# Altium PCB PCB_CL-TPI-01.PcbDoc
Units mil, origin at the board's own origin, x right, y up, seen from the top; angles counter-clockwise.
Board outline 3893 x 2557 mil, 2 copper layers (Top Layer, Bottom Layer); 76 components, 39 nets, 186 pads, 150 vias.
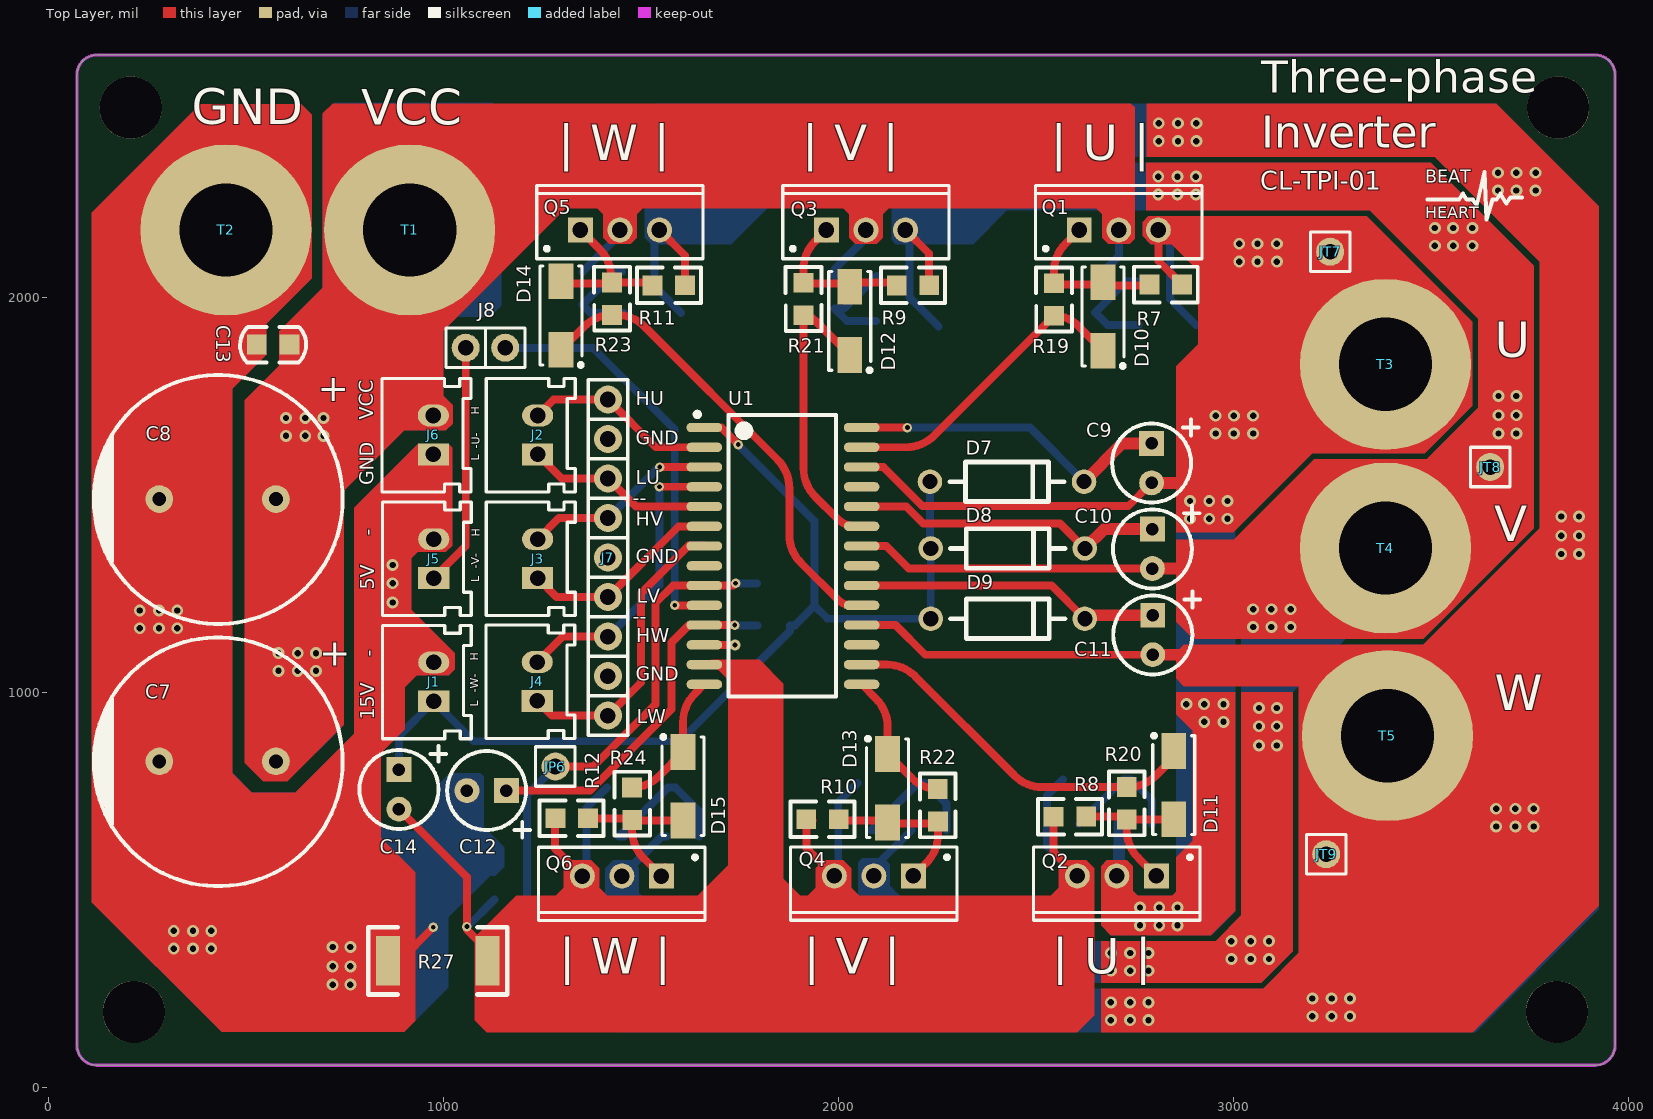
[diagram p0: Top Layer view]
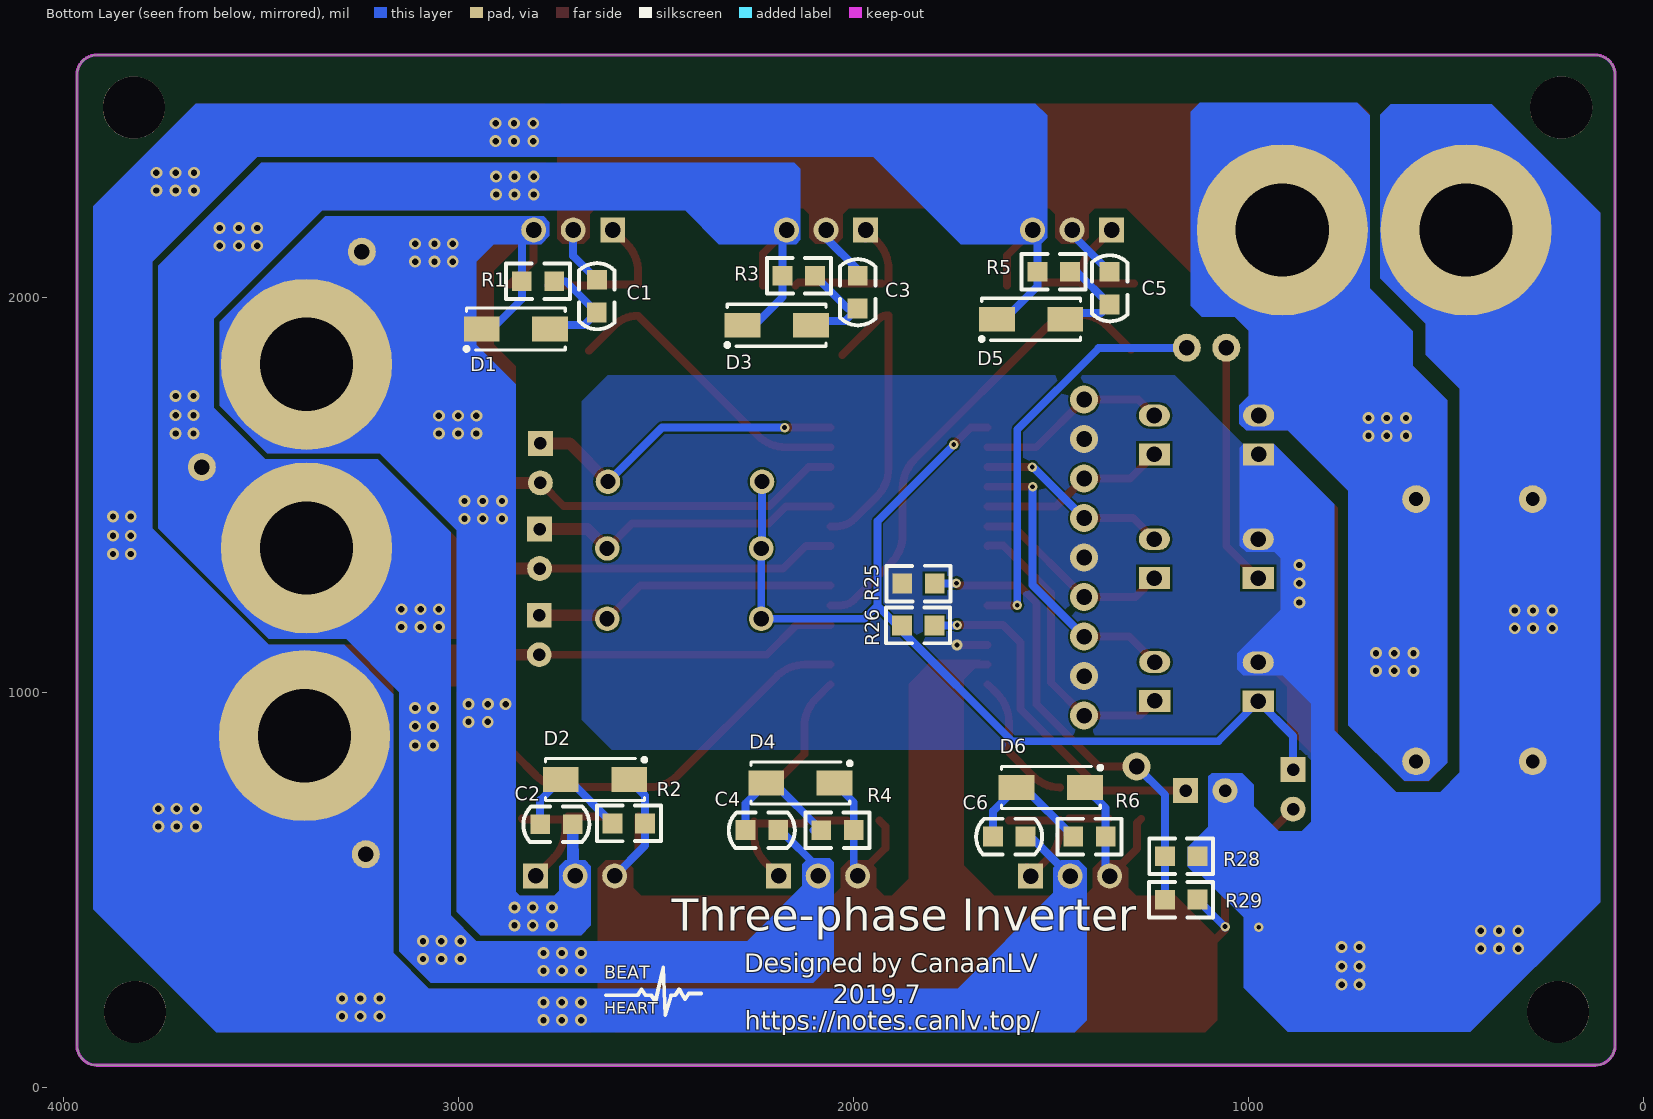
[diagram p1: Bottom Layer view, seen from below]
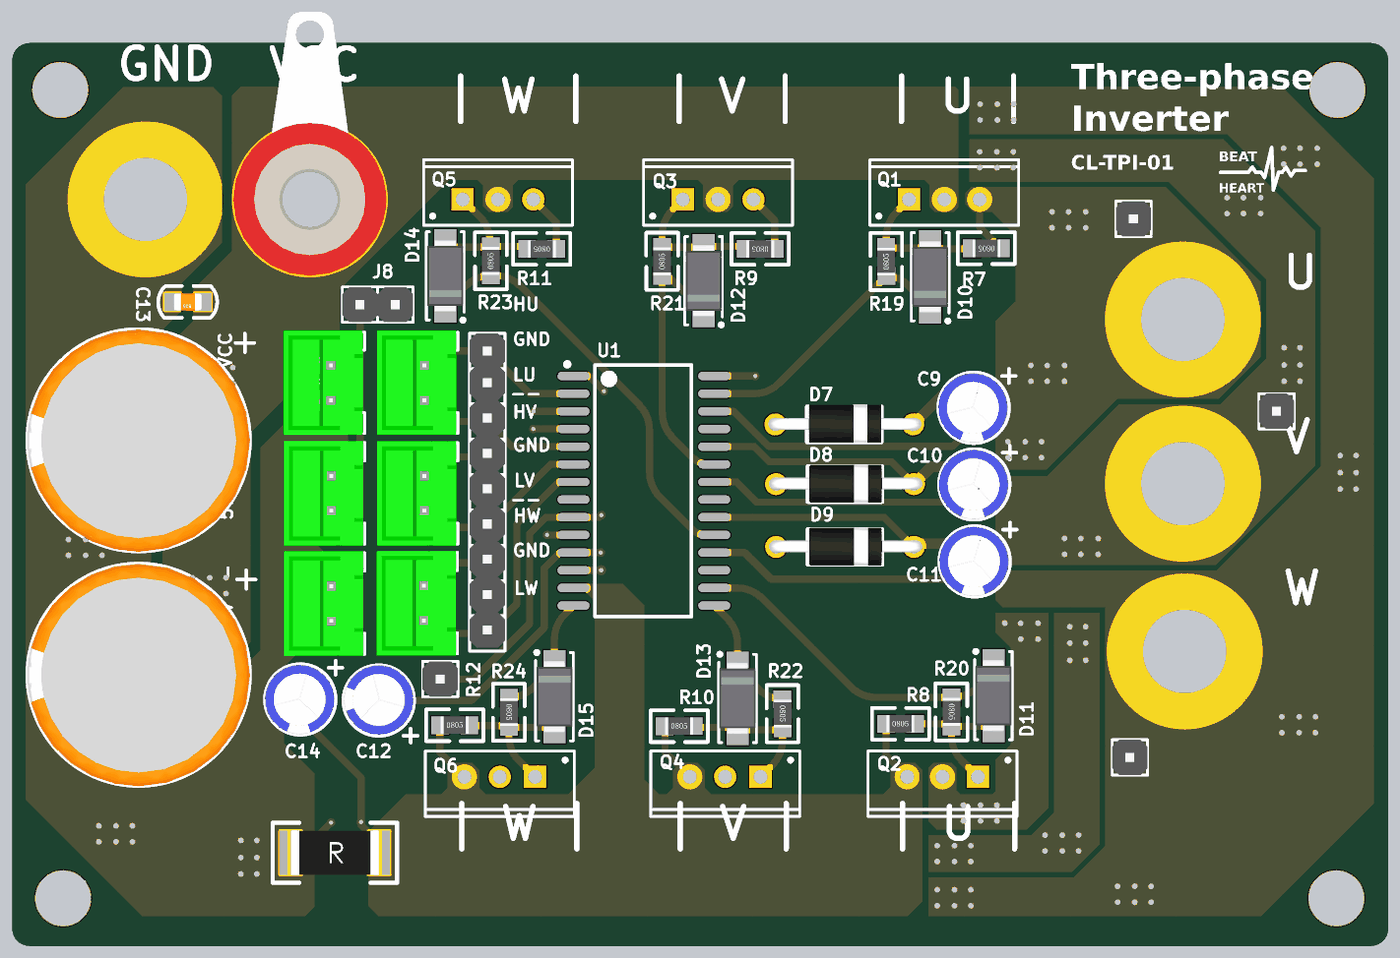
[diagram p2: 3D render of the assembled board from above, using the file's embedded part models]
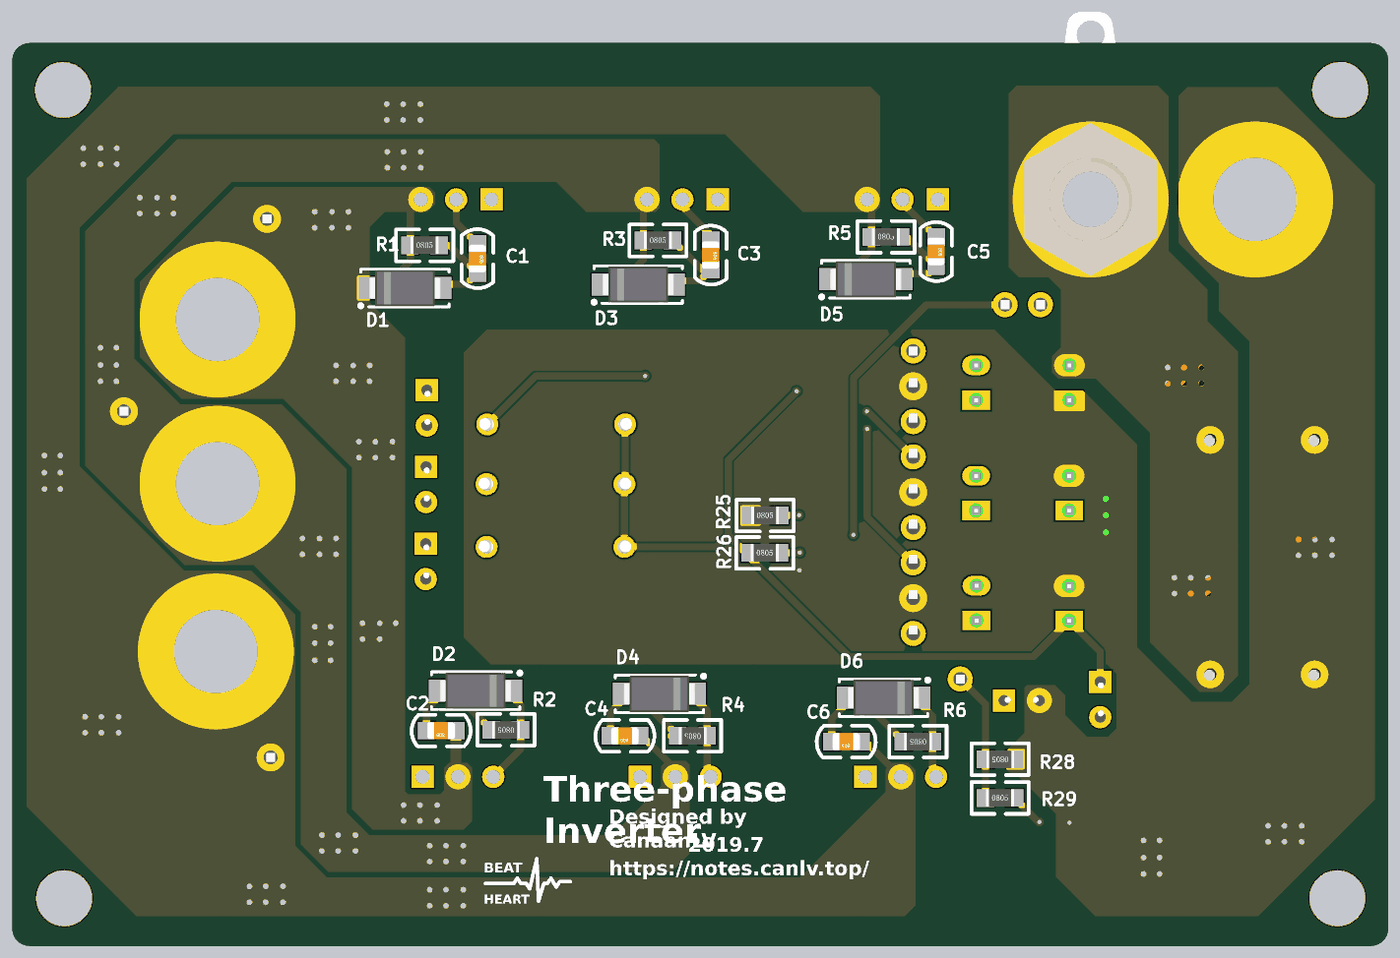
[diagram p3: 3D render of the assembled board from below, using the file's embedded part models]

## Layer stack, top to bottom
Top Solder: solder mask 0.4, Solder Resist, Dk 3.5
Top Layer: signal copper 1.4
Dielectric 1: dielectric 12.6, FR-4, Dk 4.8
Bottom Layer: signal copper 1.4
Bottom Solder: solder mask 0.4, Solder Resist, Dk 3.5

## Board outline
73,106 ccw(c123,106) 123,56 3916,56 ccw(c3916,106) 3966,106 3966,2563 ccw(c3916,2563) 3916,2613 123,2613 ccw(c123,2563) 73,2563

## Design rules (kind name [scope] priority, off if disabled: settings)
BoardOutlineClearance [All] p1: gap=7.87
Clearance [All] p1: gap=5 except(0: Arc-Text Track-Text Fill-Text Poly-Text Region-Text Text-Text; 3.5: SMDPad-Text THPad-Text Via-Text; 5.98: Arc-Via Track-Via THPad-Fill THPad-Poly THPad-Region Via-Fill Via-Poly Via-Region; 6: Arc-SMDPad Arc-THPad Track-SMDPad Track-THPad; 10: SMDPad-SMDPad SMDPad-THPad SMDPad-Via THPad-THPad THPad-Via Via-Via)
DiffPairsRouting [All] p1: maxlimit=10 minlimit=6 mostfreqgap=10 toplayer_minwidth=5.98 toplayer_maxwidth=15 toplayer_prefwidth=15 bottomlayer_minwidth=5.98 bottomlayer_maxwidth=15 bottomlayer_prefwidth=15 maxuncoupledlength=500
Height [All] p1: minheight=0 maxheight=39370.08 prefheight=500
HoleSize [All] p1: absolutevalues=TRUE maxlimit=23.62 minlimit=11.81 maxpercent=80.000 minpercent=20.000
MinimumSolderMaskSliver [All] p1: minsoldermaskwidth=1.97
PlaneConnect [All] p1: planeconnectstyle=Direct reliefexpansion=20 reliefentries=4 reliefconductorwidth=10 reliefairgap=10
PolygonConnect [All] p1: connectstyle=Direct reliefconductorwidth=10 reliefentries=4 polygonreliefangle="90 Angle" airgapwidth=10
RoomDefinition Sheet_CL-TPI-01 [InComponentClass('Sheet1')] p1: confinementstyle=ConfineIn formatcopy=TRUE lockcomponents=FALSE outline 52,35 3990,35 3990,2725 52,2725
RoutingVias [All] p1: holewidth=15.75 width=27.56 viastyle="Through Hole" minholewidth=11.81 minwidth=23.62 maxholewidth=248.03 maxwidth=275.59
SilkToSilkClearance [All] p1: silktosilkclearance=5
SilkToSolderMaskClearance [IsPad] p1: minsilkscreentomaskgap=3.5 clearancetoexposedcopper=FALSE
SolderMaskExpansion [All] p1: expansion=4
Width [All] p1: maxlimit=80 minlimit=5 preferedwidth=10
23 further rules are at their usual default settings.

## Components (designator, comment, footprint, x,y, rotation, side; value= is the part's Value field where it differs from the comment)
C1 "RCD" C0805 2650,2050 r270 bottom
C2 "RCD" C0805 2705,666 r0 bottom
C3 "RCD" C0805 1990,2060 r270 bottom
C4 "RCD" C0805 2185,651 r0 bottom
C5 "RCD" C0805 1352.3,2070 r270 bottom
C6 "RCD" C0805 1559,634.8 r0 bottom
C7 "470UF" CZ16X25 429,825 r0 top
C8 "470UF" CZ16X25 429,1489 r0 top
C9 "10uF" CZ0.50/25V47U 2793,1630 r180 top
C10 "10uF" CZ0.50/25V47U 2795,1413 r180 top
C11 "10uF" CZ0.50/25V47U 2796,1195 r180 top
C12 "47uF" CZ0.50/25V47U 1160,751 r90 top
C13 "0.1uF" C0805 617,1880 r180 top
C14 "47uF" CZ0.50/25V47U 888,804 r180 top
D1 "RCD" SMA-1 2855,1919 r0 bottom
D2 "RCD" SMA-1 2655,779 r180 bottom
D3 "RCD" SMA-1 2195,1929 r0 bottom
D4 "RCD" SMA-1 2135,770 r180 bottom
D5 "RCD" SMA-1 1551,1944 r0 bottom
D6 "RCD" SMA-1 1501,759 r180 bottom
D7 "FR207" DO-41-2 2427,1533 r0 top
D8 "FR207" DO-41-2 2429,1364 r0 top
D9 "FR207" DO-41-2 2429,1186 r0 top
D10 "M7" SMA-1 2670,1951 r270 top
D11 "M7" SMA-1 2849,765 r90 top
D12 "M7" SMA-1 2029,1940 r270 top
D13 "M7" SMA-1 2125,757 r90 top
D14 "M7" SMA-1 1298,1953.47 r270 top
D15 "M7" SMA-1 1607,762 r90 top
J1 "15V" 2.54XH接插件2P 976,977 r90 top
J2 "PWM1-U" 2.54XH接插件2P 1239,1602 r90 top
J3 "PWM2-V" 2.54XH接插件2P 1239,1289 r90 top
J4 "PWM3-W" 2.54XH接插件2P 1238,978 r90 top
J5 "5V" 2.54XH接插件2P 976,1289 r90 top
J6 "SIP-2" 2.54XH接插件2P 975,1602 r90 top
J7 "SIP-9" 2.54排针1X9 1417,1341 r270 top locked
J8 "MP" 2.54排针1X2 1057,1872 r0 top
JP6 "SIP-1" 2.54排针1X1 1284,812 r0 top
JT7 "SIP-1" 2.54排针1X1 3245,2115 r0 top
JT8 "SIP-1" 2.54排针1X1 3650,1570 r0 top
JT9 "SIP-1" 2.54排针1X1 3235,590 r0 top
Q1 "IRF540N" TO-220AB 2710,2170 r0 top
Q2 "IRF540N" TO-220AB 2705,535 r180 top
Q3 "IRF540N" TO-220AB 2070,2170 r0 top
Q4 "IRF540N" TO-220AB 2090,535 r180 top
Q5 "IRF540N" TO-220AB 1447.3,2170 r0 top
Q6 "IRF540N" TO-220AB 1452.3,534.8 r180 top
R1 "RCD" R0805 2840,2040 r180 bottom
R2 "RCD" R0805 2528,668 r0 bottom
R3 "RCD" R0805 2180,2054 r180 bottom
R4 "RCD" R0805 2000,651 r0 bottom
R5 "RCD" R0805 1535,2064 r180 bottom
R6 "RCD" R0805 1362.3,634.8 r0 bottom
R7 "10k" R0805 2870,2032 r180 top
R8 "10k" R0805 2545,685 r0 top
R9 "10k" R0805 2230,2030 r180 top
R10 "10k" R0805 1919,678.39 r0 top
R11 "10k" R0805 1612.3,2030 r180 top
R12 "10k" R0805 1284,681 r0 top
R19 "20" R0805 2546,1953 r90 top
R20 "20" R0805 2730,760 r270 top
R21 "20" R0805 1912,1954 r90 top
R22 "20" R0805 2252,755 r270 top
R23 "20" R0805 1427.3,1955 r90 top
R24 "20" R0805 1478,759 r270 top
R25 "" R0805 1877,1275 r180 bottom
R26 "" R0805 1878,1169 r180 bottom
R27 "0.025m" R2512 860,320 r180 top
R28 "R贴片电阻" R0805 1130,585 r0 bottom
R29 "R贴片电阻" R0805 1212.3,475 r180 bottom
T1 "香蕉头接线柱" 香蕉接线柱Red_6mm 915,2170 r0 top
T2 "香蕉头接线柱" 香蕉接线柱Black_6mm 450,2170 r0 top
T3 "香蕉头接线柱" 香蕉接线柱Black_6mm 3385,1830 r270 top
T4 "香蕉头接线柱" 香蕉接线柱Black_6mm 3385,1365 r270 top
T5 "香蕉头接线柱" 香蕉接线柱Black_6mm 3390,890 r270 top
U1 "IC28" SOIC-28_300MIL 1860,1345 r0 top

## Footprints (in the part's own frame and the unit in brackets; to place one, negate y for a bottom-side part, rotate by r counter-clockwise, add the part's x,y. Pads: shape width x height; smd on the part's side, far side on the other; paste and mask are expansions set on the pad)
2.54XH接插件2P [mm]
  rect 1.4x2 hole 1: 1(0,0)
  oval 1.4x2 hole 1: 2(2.5,0)
  silkscreen extent -2.41,-2.41 4.88,3.3, body extent -2.51,-2.3 4.99,3.4, height 7
2.54排针1X1 [mm]
  round 1.8 hole 1: 1(0,0)
  silkscreen extent -1.27,-1.27 1.27,1.27, body extent -1.27,-1.27 1.27,1.27, height 2.5
2.54排针1X2 [mm]
  round 1.8 hole 1: 1(0,0) 2(2.54,0)
  silkscreen extent -1.27,-1.27 3.81,1.27, body extent -1.27,-1.27 3.81,1.27, height 8.54
2.54排针1X9 [mm]
  round 1.8 hole 1: 1(-10.16,0) 2(-7.62,0) 3(-5.08,0) 4(-2.54,0) 5(0,0) 6(2.54,0) 7(5.08,0) 8(7.62,0) 9(10.16,0)
  silkscreen extent -11.43,-1.27 11.43,1.27, body extent -11.43,-1.27 11.18,1.27, height 2.5
C0805 [mil]
  rect 50x50 smd: 1(6,0) 2(88.7,-0.1)
  silkscreen extent -36,-45 131,45, body extent 8,-25 87,25, height 30
CZ0.50/25V47U [mm]
  rect 1.6x1.6 hole 0.8: 1(0,0)
  round 1.6 hole 0.8: 2(0,2.54)
  silkscreen extent -3.02,-1.52 2.54,3.81, body extent -2.45,-1.23 2.54,3.77, height 7.3
CZ16X25 [mil]
  round 70 hole 35: 1(147.64,0) 2(-147.64,0)
  silkscreen extent -313,-316 317,314, body extent -313,-317 317,313, height 984
DO-41-2 [mil]
  round 62 hole 38: A(-195,0) K(195,0)
  silkscreen extent -145,-50 145,50, body extent -215,-52 219,55, height 107
R0805 [mil] "1/8W"
  rect 50x50 smd: 1(0,0) 2(82.3,0.2)
  silkscreen extent -40,-45 122,45, body extent 1,-24 80,25, height 22
R2512 [mil]
  rect 60x125 smd: 1(0,0) 2(-251.97,0)
  silkscreen extent -302,-85 50,85, body extent -260,-65 8,65, height 25
SMA-1 [mm]
  rect 2.3x1.6 smd: A(-2.2,0) K(2.2,0)
  silkscreen extent -3.17,-1.35 3.3,1.39, body extent -2.6,-1.3 2.6,1.3, height 2.4
SOIC-28_300MIL [mm]
  oval 2.3x0.6 smd: 1(-5.058,8.255) 2(-5.058,6.985) 3(-5.058,5.715) 4(-5.058,4.445) 5(-5.058,3.175) 6(-5.058,1.905) 7(-5.058,0.635) 8(-5.058,-0.635) 9(-5.058,-1.905) 10(-5.058,-3.175) 11(-5.058,-4.445) 12(-5.058,-5.715) 13(-5.058,-6.985) 14(-5.058,-8.255) 15(5.058,-8.255) 16(5.058,-6.985) 17(5.058,-5.715) 18(5.058,-4.445) 19(5.058,-3.175) 20(5.058,-1.905) 21(5.058,-0.635) 22(5.058,0.635) 23(5.058,1.905) 24(5.058,3.175) 25(5.058,4.445) 26(5.058,5.715) 27(5.058,6.985) 28(5.058,8.255)
  silkscreen extent -5.66,-9.05 3.42,9.25
TO-220AB [mm] "TO, Thru-Hole, Vertical, Heatsink Mounted; 3 In-Line Leads; Pitch 2.54 mm"
  rect 1.6x1.6 hole 1: 1(-2.54,0)
  round 1.6 hole 1: 2(0,0) 3(2.54,0)
  silkscreen extent -5.35,-1.85 5.35,2.85, body extent -5.4,-1.9 5.4,2.9, height 19.3
香蕉接线柱Black_6mm [mm]
  round 11 hole 6: 1(0,0)
  body extent -5.5,-5.5 5.5,13.5, height 9
香蕉接线柱Red_6mm [mm]
  round 11 hole 6: 1(0,0)
  body extent -5.5,-5.5 5.5,13.5, height 9

## Part data
C1 C2 C3 C4 C5 C6 C13: library part C贴片电容
C7 C8 C9 C10 C11 C12 C14: library part C直插电容
D1 D2 D3 D4 D5 D6 D10 D11 D12 D13 D14 D15: library part 0805D
D7 D8 D9: library part DO-41
J1 J2 J3 J4 J5 J8: library part SIP-2
Q1 Q2 Q3 Q4 Q5 Q6: "HEXFET Power MOSFET"
R1 R2 R3 R4 R5 R6 R7 R8 R9 R10 R11 R12 R19 R20 R21 R22 R23 R24 R25 R26 R27: library part R贴片电阻

## Free pads (board coordinates)
  round 157.48 hole 157.48: 0(209,2480) 1(217,191) 2(3819,191) 3(3822,2480)

## Via types
v1: diameter 30, hole 16, Top Layer to Bottom Layer, tented both sides, 140 vias
v2: diameter 24, hole 12, Top Layer to Bottom Layer, tented both sides, 9 vias
v3: diameter 28, hole 13, Top Layer to Bottom Layer, tented both sides, 1 vias

## Nets (pads, with @x,y where several pads share a name; then routed paths per layer and width w, separated by ;. In a path a pad name is that pad's centre, name@x,y a point inside that pad or via, vN(x,y) a via of type N, cw(c..) or ccw(c..) an arc to the next point about the centre after c; other vN are vias at no path point)
COM: C14.2 D2.K D4.K D6.K Q2.3 Q4.3 Q6.3 R2.1 R4.1 R6.1 R8.1 R10.1 R12.1 R27.2 R29.2 U1.13 | length 2600.3
  Top Layer w20: C14.2 1060,532 v2(1060,407) 1060,399 1111.97,347.03 R27.2 ; R12.1@1272.3,679.8 1283,669.1 1283,604.1 Q6.3 ; U1.13 1734,1070 1775,1029 1775,472 1772,469 ; R10.1@1935,675 1920,660 1920,605 Q4.3 ; R8.1 2545,595 Q2.3
  Bottom Layer w20: v2(1060,407) 1060,405 1059.9,405.1 R29.2 ; Q6.3 1362.3,544.8 R6.1 1362.3,706.91 D6.K ; Q4.3 2000,545 R4.1 2000,721.61 D4.K ; D2.K 2528,738.61 R2.1 2528,612 Q2.3
EN: J8.2 U1.10 | length 1039.2
  Top Layer w20: v2(1586,1220) U1.10
  Bottom Layer w20: J8.2@1157,1883 1169,1871 1380,1871 1586,1665 v2(1586,1220)
FAULT: U1.8
GND: C7.2 C8.2 C12.2 C13.2 J1.2 J5.2 J6.1 J7.2 J7.5 J7.8 R25.1 R27.1 R28.1 T2.1 U1.12 | length 447.5
  Top Layer w20: R27.1 890,320 v2(975,405) ; U1.12 v3(1739,1120)
  Bottom Layer w20: v2(975,405) R28.1@1130,560
  other v1: 720,260 765,260 720,306.25 765,306.25 318,351 366.75,351 413,351 720,355 765,355 318,396 366.75,396 413,396 232,1162 280.75,1162 327,1162 232,1207 280.75,1207 327,1207 872,1227 872,1275.75 872,1322
HIN1: J2.2 J7.1 U1.2 | length 488.8
  Top Layer w20: J2.2 1279.57,1741 J7.1 1538,1620 U1.2
HIN2: J3.2 J7.4 U1.3 | length 497.5
  Top Layer w20: J3.2 1292.57,1441 J7.4 ; v2(1548,1570) U1.3
  Bottom Layer w20: J7.4 1546,1570 v2(1548,1570)
HIN3: J4.2 J7.7 U1.4 | length 752.3
  Top Layer w20: J4.2 1302.57,1141 J7.7 ; v2(1547.3,1520) U1.4
  Bottom Layer w20: J7.7 1547.3,1271.3 v2(1547.3,1520)
HO1: D10.K R19.1 U1.27 | length 777.5
  Top Layer w20: U1.27 2171.58,1620 ccw(c2171.58,1720) 2242.29,1649.29 R19.1 cw(c2546,1867.57) 2606.41,1927.98 D10.K
HO2: D12.K R21.1 U1.23 | length 769.5
  Top Layer w20: D12.K 1939.97,1942.41 ccw(c1912,1914.44) R21.1 1912,1566.42 ccw(c2012,1566.42) 1941.29,1495.71 1998,1439 ccw(c2043.87,1484.87) 2043.87,1420 U1.23
HO3: D14.K R23.1 U1.19 | length 1201.2
  Top Layer w20: D14.K 1357.05,1925.9 cw(c1427.3,1855.64) R23.1 1438.58,1955 cw(c1438.58,1855) 1509.29,1925.71 1846.71,1588.29 cw(c1776,1517.58) 1876,1517.58 1876,1398.42 ccw(c1976,1398.42) 1905.29,1327.71 1999,1234 ccw(c2032.8,1267.8) 2032.8,1220 U1.19
ITRIP: JP6.1 R25.2 R28.2 R29.1 U1.9 | length 1219.9
  Top Layer w20: JP6.1 1380,812 1537,969 1537,1225 1582,1270 U1.9 1734,1270 v2(1740,1276)
  Bottom Layer w20: R29.1 R28.2 1212.3,740.3 JP6.1 ; v2(1740,1276) 1740.8,1275.2 R25.2
LIN1: J2.1 J7.3 U1.5 | length 476.6
  Top Layer w20: J2.1 1300,1541 J7.3 1488,1470 U1.5
LIN2: J3.1 J7.6 U1.6 | length 515.9
  Top Layer w20: J3.1 1287,1241 J7.6 1596,1420 U1.6
LIN3: J4.1 J7.9 U1.7 | length 749.1
  Top Layer w20: J4.1 1275,941 J7.9 1501,1025 1501,1251 1621,1371 1659.89,1371 U1.7
LO1: D11.K R20.1 U1.16 | length 948.5
  Top Layer w20: U1.16 2123.58,1070 cw(c2123.58,970) 2194.29,1040.71 2445.71,789.29 ccw(c2516.42,860) 2516.42,760 R20.1 2733.58,760 ccw(c2733.58,860) 2804.29,789.29 D11.K@2857.81,842.81
LO2: D13.K R22.1 U1.15 | length 359.1
  Top Layer w20: U1.15 2095.71,983.4 cw(c2025,912.69) 2125,912.69 D13.K 2186.47,782.14 ccw(c2252,847.67) R22.1
LO3: D15.K R24.1 U1.14 | length 351.4
  Top Layer w20: R24.1 ccw(c1478,854.09) 1545.24,786.85 D15.K 1607,924.69 cw(c1707,924.69) 1636.29,995.4 U1.14
NetC1_2: C1.2 D1.A R1.2 | length 263.1
  Bottom Layer w20: R1.2 2729,2040.2 C1.2 2681.4,1930 D1.A@2760,1930
NetC2_2: C2.2 D2.A R2.2 | length 311.8
  Bottom Layer w20: R2.2 2721.5,779 D2.A 2793.7,726.91 C2.2
NetC3_2: C3.2 D3.A R3.2 | length 259.8
  Bottom Layer w20: D3.A@2095,1940 2021.4,1940 C3.2 2014.8,1971.3 R3.2
NetC4_2: C4.2 D4.A R4.2 | length 348.9
  Bottom Layer w20: R4.2@2102,650.8 R4.2 2201.5,770 D4.A 2273.7,717.91 C4.2
NetC5_2: C5.2 D5.A R5.2 | length 248.4
  Bottom Layer w20: R5.2 1435.3,2064.2 C5.2 1373.7,1960 D5.A@1457.3,1960
NetC6_2: C6.2 D6.A R6.2 | length 357.2
  Bottom Layer w20: R6.2@1458.3,634.6 R6.2 1569,759 D6.A 1647.7,698.91 C6.2
NetD10_A: D10.A Q1.1 R7.2 R19.2 | length 384.6
  Top Layer w20: R19.2@2545.8,2032.3 2664.45,2032.3 cw(c2664.45,2024.45) 2670,2030 2771.73,2030 cw(c2771.73,2028.63) R7.2@2772.7,2029.6 ; R19.2 2545.8,2064.38 cw(c2645.8,2064.38) 2575.09,2135.09 Q1.1
NetD11_A: D11.A Q2.1 R8.2 R20.2 | length 386.1
  Top Layer w20: R8.2 2722.7,685.2 R20.2 ; Q2.1 2759.49,580.51 cw(c2830.2,651.22) 2730.2,651.22 R20.2 ; D11.A@2840,680 2837.7,677.7 R20.2
NetD12_A: D12.A Q3.1 R9.2 R21.2 | length 396.7
  Top Layer w20: R21.2 1911.8,2070.38 cw(c2011.8,2070.38) 1941.09,2141.09 Q3.1 Q3.1@1970,2148.52 ; R21.2@1930,2035 2037.5,2035 2039.8,2037.3 2140.2,2037.3 R9.2
NetD13_A: D13.A Q4.1 R10.2 R22.2 | length 397.2
  Top Layer w20: R10.2@2017.3,675.2 2119.8,675.2 2127.3,667.7 R22.2@2252.2,667.7 ; Q4.1 2222.91,567.91 ccw(c2152.2,638.62) 2252.2,638.62 R22.2@2252.2,667.7 ; R22.2 R22.2@2252.2,667.7
NetD14_A: D14.A Q5.1 R11.2 R23.2 | length 405.9
  Top Layer w20: D14.A@1291,2035 R23.2@1424.8,2035 ; Q5.1 1395.51,2121.79 cw(c1324.8,2051.08) 1424.8,2051.08 R23.2@1424.8,2035 ; R11.2 1522.5,2037.3 R23.2 R23.2@1424.8,2035
NetD15_A: D15.A Q6.1 R12.2 R24.2 | length 423.3
  Top Layer w20: R12.2@1354.6,680 R24.2@1455,680 ; Q6.1@1561.8,557.73 cw(c1529.37,557.73) Q6.1 1507.49,579.61 cw(c1578.2,650.32) 1478.2,650.32 R24.2 ccw(c1481.37,679.87) 1481.37,675.39 D15.A
RCIN: C12.1 R26.2 U1.11 | length 908.6
  Top Layer w20: C12.1 1372,751 1578,957 1578,1126 1622,1170 U1.11 v2(1738,1170)
  Bottom Layer w20: v2(1738,1170) 1738.8,1169.2 R26.2
VB1: C9.1 D7.K U1.28 | length 830.8
  Top Layer w20: U1.28 v2(2175,1670)
  Top Layer w30: D7.K 2719,1630 C9.1
  Bottom Layer w20: v2(2175,1670) 2485,1670 D7.K
VB2: C10.1 D8.K U1.24 | length 800.1
  Top Layer w20: U1.24 2172,1470 2215,1427 2561,1427 D8.K
  Top Layer w30: D8.K 2673,1413 C10.1
VB3: C11.1 D9.K U1.20 | length 775.4
  Top Layer w20: U1.20 2540,1270 D9.K
  Top Layer w30: D9.K 2633,1195 C11.1
VCC: C1.1 C3.1 C5.1 C7.1 C8.1 C13.1 J6.2 Q1.2 Q3.2 Q5.2 T1.1 | length 445.3
  Bottom Layer w20: C5.1 1447.3,2159 Q5.2 ; C3.1 1990,2070 2070,2150 Q3.2 ; C1.1 2710,2104 Q1.2
  other v1: 583,1054 631.75,1054 678,1054 583,1099 631.75,1099 678,1099 602,1649 650.75,1649 697,1649 602,1694 650.75,1694 697,1694
VCC5V: J5.1 J8.1 | length 616.6
  Top Layer w20: J5.1 1057,1370 J8.1
VCC15V: C14.1 D7.A D8.A D9.A J1.1 R26.1 U1.1 | length 2612.9
  Top Layer w20: U1.1 1704,1670 v2(1747,1627)
  Bottom Layer w20: C14.1 888,889 J1.1 1077,876 1599,876 1878,1155 R26.1 1890,1169 1940,1219 ; v2(1747,1627) 1747,1626 1940,1433 1940,1219 ; D7.A 2232,1366 D8.A D9.A 1973,1186 1940,1219
VS1: C2.1 C9.2 D1.K JT7.1 Q1.3 Q2.2 R1.1 R7.1 T3.1 U1.26 | length 1924.2
  Top Layer w20: U1.26 2114,1570 2213,1471 2734,1471 C9.2 ; Q1.3 2810,2092 R7.1
  Top Layer w30: C9.2 2883,1530 2886,1527 ; 3110,1555 T3.1
  Bottom Layer w20: Q2.2 2705,601 ; Q1.3 2840,2140 R1.1 2840,1995 D1.K@2905,1930
  Bottom Layer w30: Q2.2 2711,541 C2.1
  other v1: 2763.75,410 2812.5,410 2858.75,410 2763.75,455 2812.5,455 2858.75,455 2926.25,925 2975,925 2881,970 2926,970 2975,970 2890,1439 2938.75,1439 2985,1439 2890,1484 2938.75,1484 2985,1484 2955,1655 3001.25,1655 3050,1655 2955,1700 3001.25,1700 3050,1700 3015,2090 3061.25,2090 3110,2090 3015,2135 3061.25,2135 3110,2135
VS2: C4.1 C10.2 D3.K JT8.1 Q3.3 Q4.2 R3.1 R9.1 T4.1 U1.22 | length 1524.6
  Top Layer w20: U1.22 2121.3,1370 2178.3,1313 C10.2 ; Q3.3 2230,2110 R9.1
  Top Layer w30: C10.2 2889,1313 2890,1314 ; T4.1@3335,1315 T4.1
  Bottom Layer w20: Q4.2 2090,556 C4.1@2185,651 ; Q3.3 2180,2160 R3.1 2180,2000 D3.K@2254,1926
  other v1: 2690,295 2738.75,295 2785,295 2995,325 3043.75,325 3090,325 2690,340 2738.75,340 2785,340 2995,370 3043.75,370 3090,370 3065,865 3110,865 3065,913.75 3110,913.75 3065,960 3110,960 3050,1165 3096.25,1165 3145,1165 3050,1210 3096.25,1210 3145,1210 3671.25,1655 3716.25,1655 3671.25,1701.25 3716.25,1701.25 3671.25,1750 3716.25,1750 3510,2130 3556.25,2130 3605,2130 3510,2175 3556.25,2175 3605,2175 2810,2260 2858.75,2260 2905,2260 2810,2305 2858.75,2305 2905,2305
VS3: C6.1 C11.2 D5.K JT9.1 Q5.3 Q6.2 R5.1 R11.1 T5.1 U1.18 | length 1462.7
  Top Layer w20: Q5.3 1612.3,2105 R11.1 ; U1.18 2145,1170 2220,1095 C11.2 ; 3275.67,1075 3305,1104.33
  Top Layer w30: C11.2 2881,1095 2884,1098
  Bottom Layer w20: Q6.2 1552.3,634.8 C6.1 ; Q5.3 1535,2157.7 R5.1 1535,2027.3 D5.K@1602.3,1960
  other v1: 2690,170 2738.75,170 2785,170 3200,180 3248.75,180 3295,180 2690,215 2738.75,215 2785,215 3200,225 3248.75,225 3295,225 3665,660 3713.75,660 3760,660 3665,705 3713.75,705 3760,705 3830,1350 3875,1350 3830,1396.25 3875,1396.25 3830,1445 3875,1445 3670,2270 3716.25,2270 3765,2270 3670,2315 3716.25,2315 3765,2315 2811.25,2395 2860,2395 2906.25,2395 2811.25,2440 2860,2440 2906.25,2440
pads on no net: U1.17 U1.21 U1.25

## Polygon pours and split planes (outlines as drawn)
GND on Bottom Layer "GND_L02_P004" (solid, remove dead copper, pour order 4): 1014,1628 1188,1802 1746,1802 2622,1802 2688,1736 2688,930 2612,854 868,854 831,817 810,838 810,1424

## Keep-outs
Keep-Out Layer:
  lines w7.87: 73,106 ccw(c123,106) 123,56 3916,56 ccw(c3916,106) 3966,106 3966,2563 ccw(c3916,2563) 3916,2613 123,2613 ccw(c123,2563) 73,2563 73,2479 73,106

## Other copper
Top Layer:
  region net COM: 1694,1059 1721,1032 1721,562 1639,480 1643,476 1913,476 1861,528 1861,1022 1801,1082 1679,1082
  region net VCC: 694,2023 585,1914 585,1826 498,1739 498,822 545,775 605,775 748,918 748,1663 1035,1950
  region net VCC: 736,1497 902,1663 1007,1663 1024,1680 1024,1727 1000,1751 1000,1919 955,1919 736,1700
  region net GND: 663,2466 641,2488 385,2488 111,2214 111,469 439,141 902,141 929,168 929,544 727,746 515,746 466,795 466,1768 552,1854 552,1933 667,2048 667,2462
  region net GND: 937,1629 775,1467 775,894.83 573.58,693.41 649,618 831,618 842,629 842,846 902.5,906.5 902.5,1012.5 933,1043 1014,1043 1029,1058 1029,1099 919,1209 919,1339 935,1355 1007,1355 1023,1371 1023,1619 1014,1628
  region net VCC: 1035,1950 1140,2055 1310,2225 2750,2225 2750,2480.2 2740.2,2490 720,2490 695,2465 695,1950
  region net VCC: 1405,2150 1420,2135 1475,2135 1490,2150 1490,2210 1505,2225 1390,2225 1405,2210
  region net VCC: 2027.7,2150 2042.7,2135 2097.7,2135 2112.7,2150 2112.7,2210 2127.7,2225 2012.7,2225 2027.7,2210
  region net VCC: 2667.7,2150 2682.7,2135 2737.7,2135 2750,2147.3 2750,2225 2652.7,2225 2667.7,2210
  region net COM: 1080,380 1185,485 2647.7,485 2647.7,182.7 2605,140 1110,140 1080,170
  region net COM: 1325,574.82 1305,554.82 1305,505 1280,480 1420,480 1395,505 1395,554.82 1375,574.82
  region net COM: 1962.7,575.02 1942.7,555.02 1942.7,505.2 1917.7,480.2 2057.7,480.2 2032.7,505.2 2032.7,555.02 2012.7,575.02
  region net COM: 2577.7,575.02 2557.7,555.02 2557.7,505.2 2517.5,465 2647.7,465 2647.7,477.3 2647.7,555.02 2627.7,575.02
  region net VS1: 2730,575 2745,560 2745,497.5 2757.5,485 2845,485 2855,495 2855,582.5 2897,624.5 2897,902 2855,944 2855,1000 3005,1000 3005,447.5 2942.5,385 2690,385 2665,410 2665,560 2680,575
  region net VS1: 2911,1880 2911,2134 3165,1880
  region net VS1: 2770,2155 2791,2134 2844,2134 3165,1813 3165,1640 3200,1605 3485,1605 3605,1725 3605,1937.5 3337.5,2205 2785,2205 2770,2190
  region net VS2: 2780,2220 3345,2220 3620,1945 3620,1720 3490,1590 3205,1590 3165,1550 3165,1175 3205,1135 3480,1135 3760,1415 3760,2080 3500,2340 2780,2340
  region net VS3: 2780.5,2355 3510,2355 3775,2090 3775,1415 3480,1120 3270,1120 3165,1015 3165,695 3190,670 3495,670 3925,1100 3925,2230 3665,2490 2780.5,2490
  region net VS3: 2665,250 3075,250 3165,340 3165,695 3925,695 3925,459 3606,140 2665,140
  region net VS2: 2665,370 2955,370 3020,435 3020,1000 3150,1000 3150,345 3070,265 2665,265
  region net VS3: 3925,695 3925,1100 3520,695
  region net VS1: 2910,1880 2855,1825 2855,1405 3000,1405 3200,1605 3165,1640 3165,1880
  region net VS2: 3165,1550 3001.25,1386.25 2855,1386.25 2855,1178.75 2898.75,1135 3205,1135
  region net VS3: 3165,1015 2875,1015 2855,1035 2855,1100 2875,1120 3270,1120
Bottom Layer:
  region net GND: 832,682 866,648 924,648 987,711 987,766 1016,795 1094,795 1102,787 1102,660 1154,608 1154,558 1132,536 1102,536 1013,447 1013,252 929,168
  region net VCC: 694,2023 694,2461 725,2492 1124,2492 1147,2469 1147,1978 1119,1950 1035,1950
  region net VCC: 694,2023 585,1914 585,1826 498,1739 498,822 544,776 607,776 748,917 748,1663 1035,1950
  region net VCC: 736,1497 902,1663 1007,1663 1024,1680 1024,1727 1000,1751 1000,1919 955,1919 736,1700
  region net GND: 663,2466 641,2488 385,2488 111,2214 111,469 439,141 902,141 929,168 929,544 726,747 516,747 466,797 466,1768 552,1854 552,1933 667,2048 667,2462
  region net GND: 937,1629 784,1476 784,903.83 596.48,716.31 694.8,618 831,618 842,629 842,971 914,1043 1014,1043 1029,1058 1029,1099 919,1209 919,1339 935,1355 1007,1355 1023,1371 1023,1619 1014,1628
  region net VS1: 2730,575 2745,560 2745,497.5 2757.5,485 2845,485 2855,495 2855,1780 2955,1880 3165,1880 3165,1640 3200,1605 3005,1410 3005,445 2945,385 2690,385 2665,410 2665,560 2680,575
  region net VS1: 2955,1880 2955,2090 3165,1880
  region net VS1: 2770,2155 2791,2134 2911,2134 3165,1880 3165,1640 3200,1605 3485,1605 3605,1725 3605,1937.5 3337.5,2205 2785,2205 2770,2190
  region net VS2: 2135,2145 2146,2134 2341,2134 2427,2220 3345,2220 3620,1945 3620,1720 3490,1590 3205,1590 3165,1550 3165,1175 3205,1135 3480,1135 3760,1415 3760,2080 3500,2340 2150,2340 2135,2325
  region net VS3: 1510,2150 1526,2134 1729,2134 1950,2355 3510,2355 3775,2090 3775,1415 3480,1120 3290,1120 3165,995 3165,695 3190,670 3495,670 3925,1100 3925,2230 3665,2490 1540,2490 1510,2460
  region net VS3: 1476,575 1495,556 1495,492.26 1737.26,250 3075,250 3165,340 3165,695 3925,695 3925,451 3614,140 1440,140 1410,170 1410,555 1430,575
  region net VS2: 2115,580 2130,565 2130,510 2270,370 2955,370 3020,435 3020,1405 3167.5,1552.5 3195,1525 3195,1145 3295,1145 3150,1000 3150,345 3070,265 2102.3,265 2050,317.3 2050,570 2060,580
  region net VS3: 3925,695 3925,1100 3520,695

## Silkscreen, mask and mechanical layers (free items; w line width, h text height)
Top Overlay:
  lines w10: 3491,2247 3571,2247 3581,2262 3591,2247 3606,2247 3616,2232 3636,2317 3641,2197 3656,2247 3666,2247 3676,2262 3691,2237 3701,2252 3731,2252
  text "GND" at 364,2438 h90
  text "VCC" at 792,2436 h90
  text "Three-phase / Inverter" at 3070,2350 h140
  text "| W |" at 1291,2347 h90
  text "| V |" at 1909,2347 h90
  text "| U |" at 2538,2347 h90
  text "BEAT" at 3486,2278 h55
  text "CL-TPI-01" at 3068,2255 h80
  text "HEART" at 3486,2190 h50
  text "U" at 3662,1848 h90
  text "HU" at 1487,1726 h35
  text "H" at 1091,1702 h20 r90
  text "VCC" at 823,1690 h35 r90
  text "GND" at 1487,1627 h35
  text "-U-" at 1092.18,1616 h20 r90
  text "L" at 1091,1586 h20 r90
  text "LU" at 1487,1526 h35
  text "GND" at 824,1524 h35 r90
  text "--" at 1480,1474 h35
  text "HV" at 1487,1421 h35
  text "-" at 825,1396 h35 r90
  text "H" at 1092.18,1394 h20 r90
  text "V" at 3660,1382 h90
  text "GND" at 1487,1327 h35
  text "-V-" at 1091,1313 h20 r90
  text "L" at 1091,1278 h20 r90
  text "5V" at 826,1260 h35 r90
  text "LV" at 1490.3,1227 h35
  text "--" at 1480,1174 h35
  text "HW" at 1489,1127 h35
  text "-" at 828,1090 h35 r90
  text "H" at 1089,1080 h20 r90
  text "GND" at 1487,1029 h35
  text "-W-" at 1089,999 h20 r90
  text "L" at 1089,963 h20 r90
  text "W" at 3662,954 h90
  text "15V" at 825,930 h35 r90
  text "LW" at 1490.3,922 h35
  text "| W |" at 1294,287 h90
  text "| V |" at 1912,287 h90
  text "| U |" at 2541,287 h90
Bottom Overlay:
  lines w10: 2387,238 2417,238 2427,223 2442,248 2452,233 2462,233 2477,183 2482,303 2502,218 2512,233 2527,233 2537,248 2547,233 2627,233
  text "Three-phase Inverter" at 2461,368 h140
  text "Designed by CanaanLV" at 2277,275 h80
  text "BEAT" at 2632,264 h55
  text "2019.7" at 2053,196 h80
  text "HEART" at 2632,176 h50
  text "https://notes.canlv.top/" at 2276,129 h80

## Text inside footprints (layer, text, board x,y; h text height)
C7: Top Overlay "+" at 686,1067 h68.9
C8: Top Overlay "+" at 682,1737 h68.9